# Altium PCB ARMBAND.PcbDoc
Units mm, origin at the board's own origin, x right, y up, seen from the top; angles counter-clockwise.
Board outline 29.72 x 39.62 mm, 2 copper layers (Top Layer, Bottom Layer); 21 components, 22 nets, 97 pads, 30 vias.
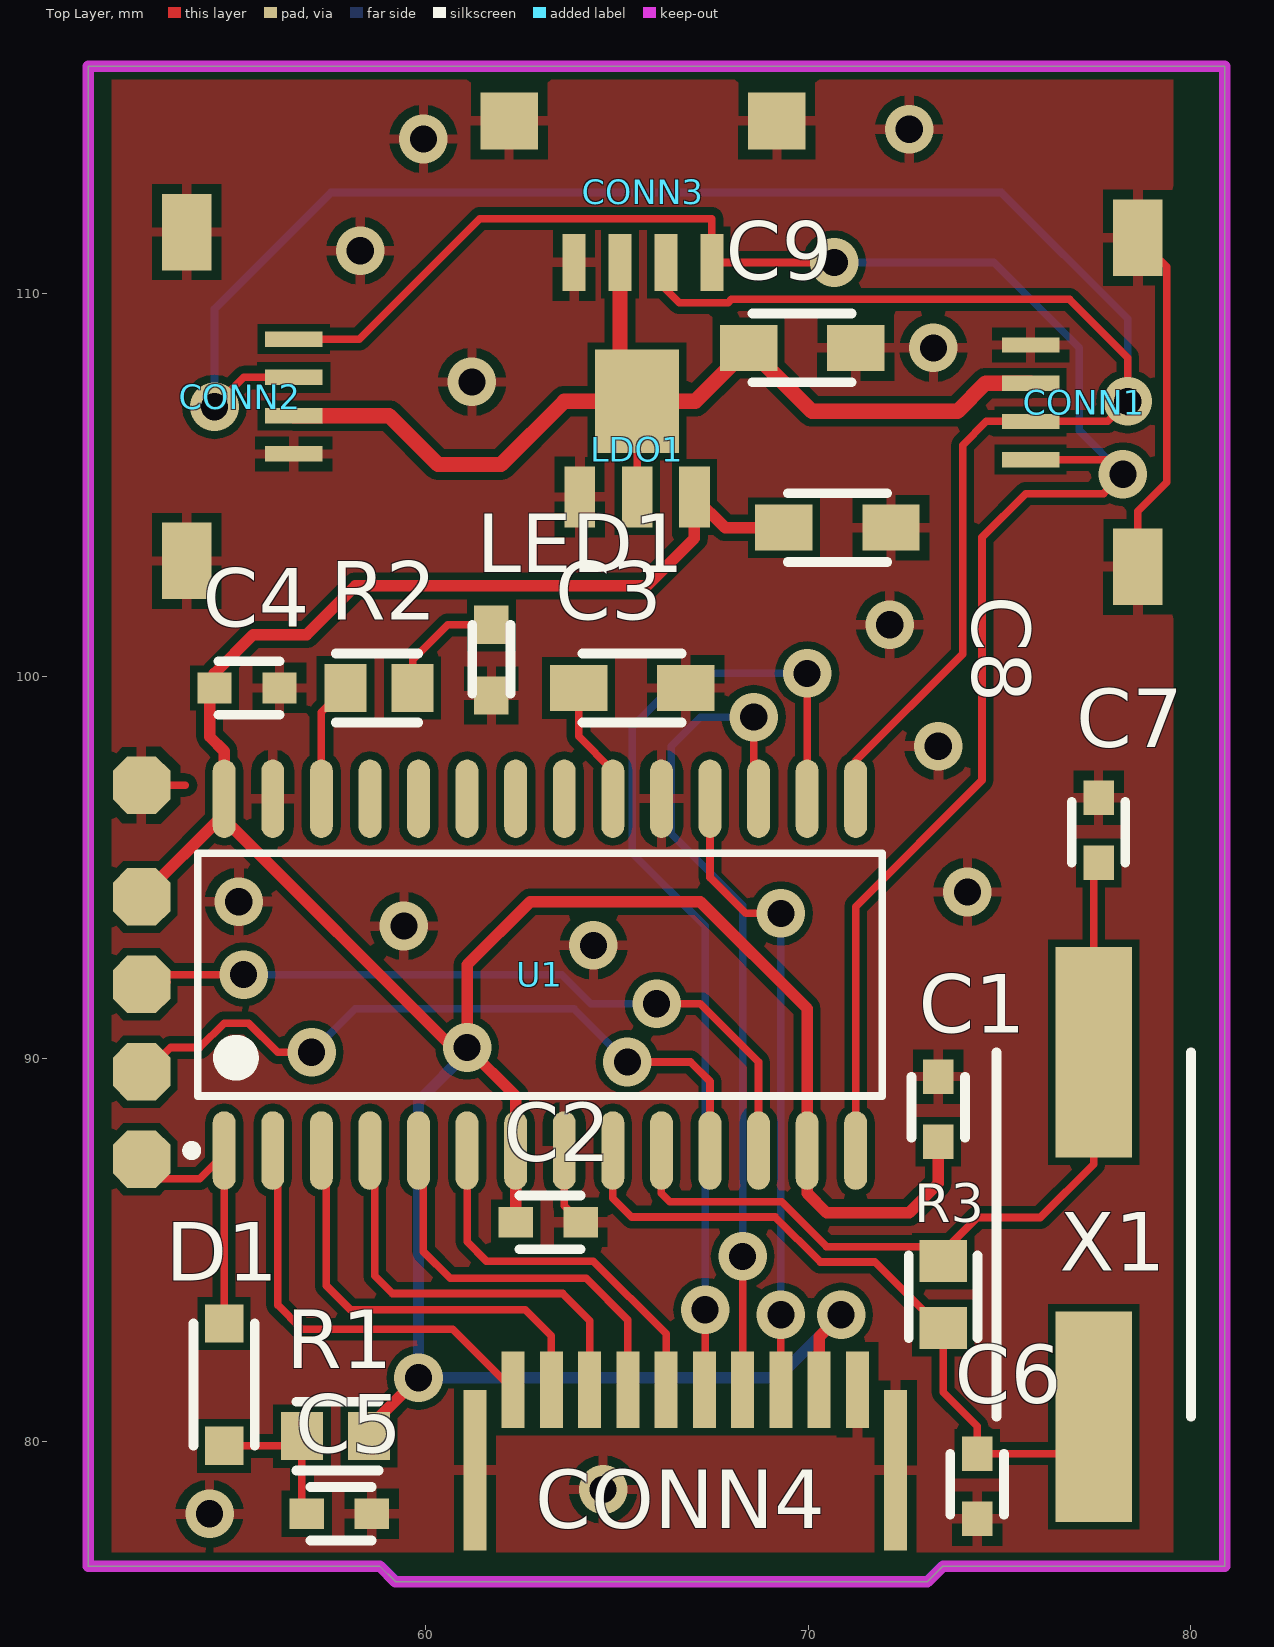
[diagram p0: Top Layer view]
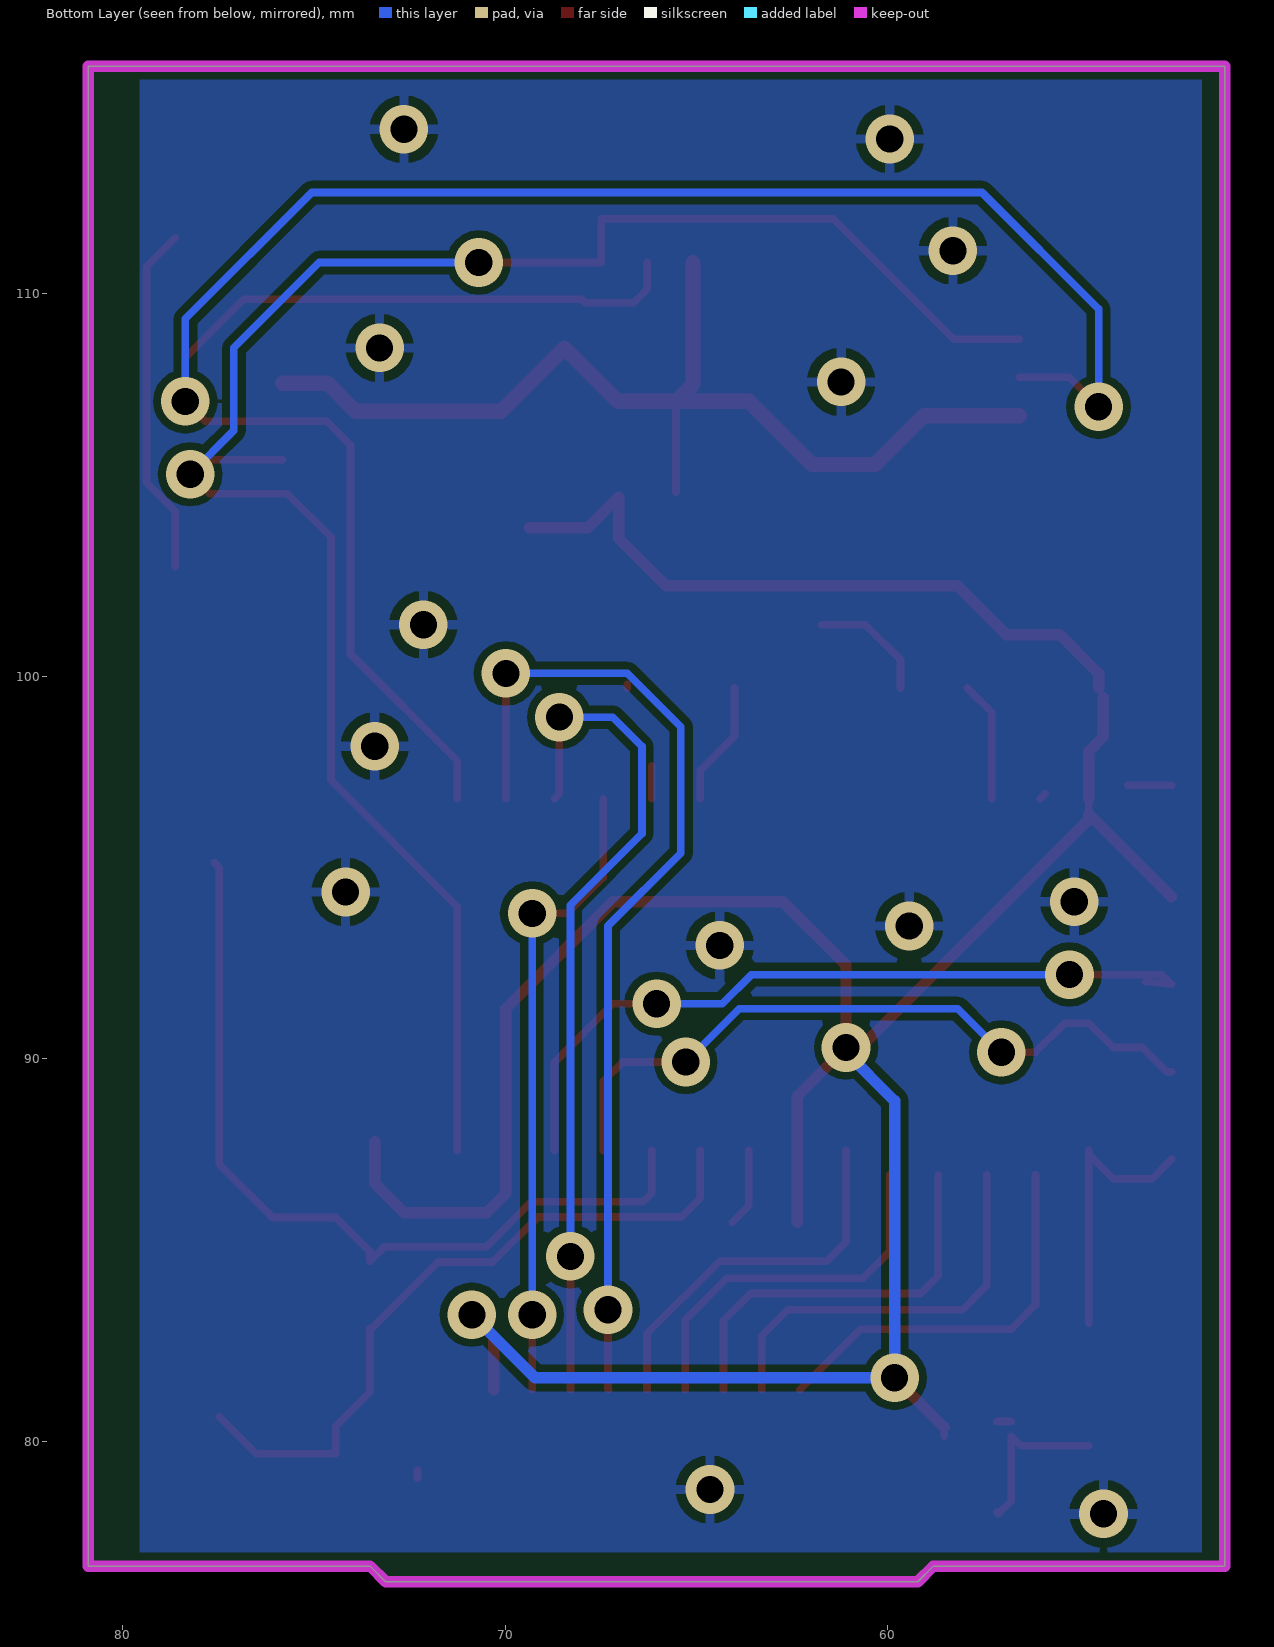
[diagram p1: Bottom Layer view, seen from below]

## Layer stack, top to bottom
Top Solder: solder mask 0.0102, Solder Resist, Dk 3.5
Top Layer: signal copper 0.0356
Dielectric 1: dielectric 0.32, FR-4, Dk 4.8
Bottom Layer: signal copper 0.0356
Bottom Solder: solder mask 0.0102, Solder Resist, Dk 3.5

## Board outline
51.181,77.605 51.181,115.951 80.899,115.951 80.899,76.738 73.533,76.738 73.122,76.327 59.212,76.327 58.801,76.738 51.181,76.738

## Design rules (kind name [scope] priority, off if disabled: settings)
Clearance [All] p1: gap=0.2 ignorepadtopadclearanceinfootprint=FALSE
PolygonConnect [All] p1: connectstyle=Relief reliefconductorwidth=0.254 reliefentries=4 polygonreliefangle="90 Angle" airgapwidth=0.254
RoomDefinition ARMBAND [InComponentClass('ARMBAND')] p1: confinementstyle=ConfineIn formatcopy=TRUE lockcomponents=FALSE outline 50.447,75.819 81.153,75.819 81.153,116.459 50.447,116.459
RoutingVias [All] p1: holewidth=0.6 width=1 viastyle="Through Hole" minholewidth=0.711 minwidth=1.27 maxholewidth=0.711 maxwidth=1.27
SolderMaskExpansion [All] p1: expansion=0.102
Width [All] p1: maxlimit=0.4 minlimit=0.2 preferedwidth=0.2 bottomlayer_maxwidth=0.3 minimp=50.000000 maximp=50.000000 favimp=50.000000
30 further rules are at their usual default settings.

## Components (designator, comment, footprint, x,y, rotation, side; value= is the part's Value field where it differs from the comment)
C1 "100nF" CApacitor_1608 73.406,87.835 r90 top
C2 "100nF" CApacitor_1608 62.357,85.725 r0 top
C3 "1uF" Capacitor_20x12 64.102,99.695 r0 top
C4 "100nF" CApacitor_1608 54.483,99.695 r0 top
C5 "100nF" CApacitor_1608 56.896,78.105 r0 top
C6 "30pF" CApacitor_1608 74.422,77.978 r90 top
C7 "30pF" CApacitor_1608 77.597,96.823 r270 top
C8 "1uF" Capacitor_20x12 69.469,103.886 r0 top
C9 "1uF" Capacitor_20x12 68.547,108.585 r0 top
CONN1 "4_pin_connector" 4PIN_1MMPITCH_FFC_FCP_ZIF 78.019,107.164 r270 top
CONN2 "4_pin_connector" 4PIN_1MMPITCH_FFC_FCP_ZIF 54.356,107.315 r90 top
CONN3 "4_pin_connector" 4Pin_PICO_EZ_MATE_Header 65.786,113.919 r180 top
CONN4 "10_pin_connector" 10Pin_1mmpitch_FFC_FCP_ZIF 61.291,79.248 r0 top
D1 "Diode_SMD" DIODE_17x38 54.737,79.883 r90 top
LDO1 "Voltage Reg." LDO_460x260 65.532,104.688 r0 top
LED1 "LED_SMD" LED_1608 61.722,101.346 r270 top
R1 "1kOhm" Resistor_1608 58.519,80.137 r180 top
R2 "100Ohm" Resistor_1608 57.912,99.695 r0 top
R3 "1MOhm" Resistor_1608 73.533,82.959 r90 top
U1 "DSPIC33EP128MC202-I/SO" MCHP-SOIC-SO28_N 62.992,92.202 r90 top
X1 "8MHz" xTal_150x20 77.47,80.645 r90 top

## Footprints (in the part's own frame and the unit in brackets; to place one, negate y for a bottom-side part, rotate by r counter-clockwise, add the part's x,y. Pads: shape width x height; smd on the part's side, far side on the other; paste and mask are expansions set on the pad)
4PIN_1MMPITCH_FFC_FCP_ZIF [mm]
  rect 0.4x1.5 smd: 1(1.5,-2.2) 2(0.5,-2.2) 3(-0.5,-2.2) 4(-1.5,-2.2)
  rect 2x1.3 smd: GND(-4.3,0.6) GND(4.3,0.6)
  body extent -5,-2.55 5,2.75, height 1.88
4Pin_PICO_EZ_MATE_Header [mm]
  rect 0.6x1.5 smd: 1(-1.7,3.1) 2(-0.5,3.1) 3(0.7,3.1) 4(1.9,3.1)
  rect 1.5x1.5 smd: GND(-3.4,-0.6) GND(3.6,-0.6)
  body extent -3.3,-1.5 3.3,3.03, height 1.55
10Pin_1mmpitch_FFC_FCP_ZIF [mm]
  rect 0.6x2 smd: 1(1,2.1) 2(2,2.1) 3(3,2.1) 4(4,2.1) 5(5,2.1) 6(6,2.1) 7(7,2.1) 8(8,2.1) 9(9,2.1) 10(10,2.1)
  rect 0.6x4.2 smd: GND(0,0) GND(11,0)
  body extent 0,-2.5 11,1.6, height 1
Capacitor_20x12 [mm]
  rect 1.5x1.2 smd: Cap_p1(-0.1,0) Cap_p2(2.7,0)
  silkscreen extent 0,-0.9 2.6,0.9, body extent -0.4,-0.7 2.95,0.7, height 1.5
CApacitor_1608 [mm]
  rect 0.9x0.8 smd: Cap_p1(0,0) Cap_p2(1.7,0)
  silkscreen extent 0.1,-0.7 1.7,0.7, body extent -0.3,-0.5 2,0.5, height 1.5
DIODE_17x38 [mm]
  rect 1x1 smd: Anode(0,0) Cathode(3.2,0)
  silkscreen extent 0,-0.8 3.2,0.8, body extent 0.2,-0.8 3,0.8, height 1.5
LDO_460x260 [mm]
  rect 0.8x1.6 smd: GND(-1.5,0) Vin(0,0) Vout(1.5,0)
  rect 2.2x2.7 smd: Vin(0,2.5)
  body extent -2.5,0 2.5,2.2, height 1.6
LED_1608 [mm]
  rect 1x0.9 smd: Anode(0,0) Cathode(1.85,0)
  silkscreen extent 0,-0.5 1.8,0.5, body extent 0,-0.4 1.8,0.4, height 0.9
MCHP-SOIC-SO28_N [mm] "SOIC, 28-Leads, Body 17.9x7.5mm, Pitch 1.27mm, IPC Medium Density"
  oval 2.05x0.6 smd: 1(-4.6,8.255) 2(-4.6,6.985) 3(-4.6,5.715) 4(-4.6,4.445) 5(-4.6,3.175) 6(-4.6,1.905) 7(-4.6,0.635) 8(-4.6,-0.635) 9(-4.6,-1.905) 10(-4.6,-3.175) 11(-4.6,-4.445) 12(-4.6,-5.715) 13(-4.6,-6.985) 14(-4.6,-8.255) 15(4.6,-8.255) 16(4.6,-6.985) 17(4.6,-5.715) 18(4.6,-4.445) 19(4.6,-3.175) 20(4.6,-1.905) 21(4.6,-0.635) 22(4.6,0.635) 23(4.6,1.905) 24(4.6,3.175) 25(4.6,4.445) 26(4.6,5.715) 27(4.6,6.985) 28(4.6,8.255)
  silkscreen extent -4.72,-8.95 3.18,9.23, body extent -3.75,-8.95 3.75,8.95, height 2.65
Resistor_1608 [mm]
  rect 1.1x1.25 smd: Res_p1(0,0) Res_p2(1.75,0)
  silkscreen extent -0.26,-0.9 1.9,0.9, body extent -0.4,-0.7 2.2,0.7, height 1.5
xTal_150x20 [mm]
  rect 5.5x2 smd: xTal_0(0,0) xTal_1(9.525,0)
  silkscreen extent 0,-2.54 9.53,2.54, body extent -0.1,-2.1 9.1,2.1, height 2.5

## Part data
C1 C2 C3 C4 C5 C6 C7 C8 C9: library part Capacitor_SMD, "SMD Capacitor"
CONN1 CONN2 CONN3: "4 Pin Connector"
CONN4: "10 Pin Connector"
D1: "SMD Diode"
LDO1: library part Voltage_Regulator_3.3V, "LDO Voltage Regulator", Manifacturer="ST Microelectronics"
LED1: "SMD Blue LED"
R1 R2 R3: library part Resistor_SMD, "SMD Resistor", Manifacturer=Vishay
U1: "16-Bit Microcontroller and Digital Signal Controller with High-Speed PWM, Op Amps and Advanced Analog, 70 MIPS, 21 I/O, GPIO, -40 to 85 degC, 28-pin SOIC (SO28), Tube", Manufacturer=Microchip, Supplier Part Number 1=DSPIC33EP128MC202-I/SO-ND, ComponentLink1Description="Manufacturer URL", ComponentLink1URL=http://www.microchip.com, ComponentLink2Description=Datasheet, ComponentLink2URL=http://ww1.microchip.com/downloads/en/DeviceDoc/70657F.pdf, ComponentLink3Description="Package Specification", ComponentLink3URL=http://www.microchip.com/stellent/groups/techpub_sg/documents/packagingspec/en012702.pdf, ComponentLink4Description="Product URL", ComponentLink4URL=http://www.microchip.com/dsPIC33EP128MC202, DatasheetVersion="Rev. F", Mounting Technology="Surface Mount", PackageDescription="28-Lead Plastic Small Outline, 17.9 x 7.5 mm Body, 1.27 mm Pitch", PackageReference=SOIC-SO28, PackageVersion=C04-052C, PartNumber=DSPIC33EP128MC202-I/SO, Supplier 1=Digi-Key, Supplier 2=Mouser, Supplier Part Number 2=579-33EP128MC202ISO
X1: library part xTal_ECS_inc, "8MHz Crystal/Resonator", Frequency=8MHz, Manifacturer="ECS International"

## Free pads (board coordinates)
  oct 1.5x1.5 smd: ""(52.578,87.376) ""(52.578,89.662) ""(52.578,91.948) ""(52.578,94.234) ""(52.578,97.155)

## Via types
v1: diameter 1.27, hole 0.711, Top Layer to Bottom Layer, 30 vias

## Nets (pads, with @x,y where several pads share a name; then routed paths per layer and width w, separated by ;. In a path a pad name is that pad's centre, name@x,y a point inside that pad or via, vN(x,y) a via of type N, cw(c..) or ccw(c..) an arc to the next point about the centre after c; other vN are vias at no path point)
3V3: C1.Cap_p1 C2.Cap_p1 C4.Cap_p1 C8.Cap_p1 CONN4.9 LDO1.Vout pad.@52.578,94.234 R1.Res_p1 U1.7 U1.13 U1.28 | length 86.4
  Top Layer w0.2: U1.28@54.737,96.266 54.737,96.393 U1.28 ; R1.Res_p1 R1.Res_p1@58.519,80.363 ; v1@60.706,90.297 v1(61.087,90.297)
  Top Layer w0.3: pad.@52.578,94.234 U1.28@54.737,96.393 ; C4.Cap_p1@54.356,99.441 54.356,98.425 54.737,98.044 U1.28 ; C4.Cap_p1 54.483,100.076 55.499,101.092 56.896,101.092 58.166,102.362 65.786,102.362 67.032,103.608 LDO1.Vout 67.834,103.886 C8.Cap_p1 ; U1.28@54.737,96.266 v1@60.706,90.297 ; R1.Res_p1@58.519,80.363 v1(59.817,81.661) ; C2.Cap_p1 U1.7 62.357,89.027 v1(61.087,90.297) 61.087,92.456 62.738,94.107 67.183,94.107 69.977,91.313 U1.13 69.977,86.487 70.485,85.979 72.644,85.979 73.406,86.741 C1.Cap_p1 ; CONN4.9 70.291,82.737 v1(70.866,83.312)
  Bottom Layer w0.3: v1(61.087,90.297) 61.087,90.17 59.817,88.9 v1(59.817,81.661) 69.215,81.661 v1(70.866,83.312)
5V: C9.Cap_p1 CONN1.3 CONN2.3 CONN3.3 LDO1.Vin | length 28.2
  Top Layer w0.2: LDO1.Vin@65.532,104.815 LDO1.Vin@65.532,107.188
  Top Layer w0.4: CONN2.3 59.047,106.815 60.325,105.537 61.976,105.537 63.627,107.188 LDO1.Vin@65.532,107.188 ; CONN3.3 65.086,107.634 LDO1.Vin@65.532,107.188 ; CONN1.3 74.644,107.664 73.908,106.928 70.104,106.928 C9.Cap_p1 67.05,107.188 LDO1.Vin@65.532,107.188
\M\C\L\R\: D1.Cathode pad.@52.578,87.376 U1.1 | length 7.2
  Top Layer w0.2: pad.@52.578,87.376 53.086,86.868 54.102,86.868 U1.1@54.737,87.503 ; D1.Cathode U1.1@54.737,87.503 ; U1.1 U1.1@54.737,87.503
AN0: CONN4.1 U1.2 | length 10.5
  Top Layer w0.2: U1.2@56.134,86.967 56.134,83.566 56.769,82.931 60.708,82.931 CONN4.1
AN1: CONN4.2 U1.3 | length 10.7
  Top Layer w0.2: U1.3@57.404,86.967 57.404,84.074 58.039,83.439 62.611,83.439 63.291,82.759 CONN4.2
AN2: CONN4.3 U1.4 | length 10.5
  Top Layer w0.2: U1.4@58.674,86.967 58.674,84.328 59.139,83.863 63.584,83.863 64.291,83.156 CONN4.3
AN3: CONN4.4 U1.5 | length 9.9
  Top Layer w0.2: U1.5@59.944,86.967 59.944,84.963 60.644,84.263 64.2,84.263 65.291,83.172 CONN4.4
AN4: CONN4.5 U1.6 | length 10
  Top Layer w0.2: U1.6 61.087,85.217 61.595,84.709 64.389,84.709 66.291,82.807 CONN4.5
AN19: CONN4.6 U1.16 | length 26.6
  Top Layer w0.2: CONN4.6 67.31,81.367 v1(67.31,83.439) ; U1.16 v1(69.977,100.076)
  Bottom Layer w0.2: v1(67.31,83.439) 67.31,93.472 65.405,95.377 65.405,98.679 66.802,100.076 v1(69.977,100.076)
AN20: CONN4.7 U1.17 | length 22.4
  Top Layer w0.2: CONN4.7 v1(68.291,84.836) ; v1(68.58,98.933) 68.58,96.929 U1.17
  Bottom Layer w0.2: v1(68.291,84.836) 68.291,94.015 66.421,95.885 66.421,98.171 67.183,98.933 v1(68.58,98.933) v1@68.707,98.933
AN21: CONN4.8 U1.18 | length 16.8
  Top Layer w0.2: U1.18 67.437,94.742 68.377,93.802 v1(69.291,93.802) ; CONN4.8 v1(69.291,83.312)
  Bottom Layer w0.2: v1(69.291,83.312) v1(69.291,93.802)
GND: C1.Cap_p2 C2.Cap_p2 C3.Cap_p2 C4.Cap_p2 C5.Cap_p2 C6.Cap_p1 C7.Cap_p1 C8.Cap_p2 C9.Cap_p2 CONN1.4 CONN1.GND CONN2.4 CONN2.GND CONN3.4 CONN3.GND CONN4.10 CONN4.GND LDO1.GND LED1.Cathode pad.@52.578,97.155 U1.8 U1.19 U1.27 | length 13.8
  Top Layer w0.2: pad.@52.578,97.155 53.721,97.155 ; U1.27@55.88,96.929 U1.27 ; U1.8 63.627,86.155 C2.Cap_p2 ; U1.19 U1.19@66.167,97.663 ; C3.Cap_p2 C3.Cap_p2@66.802,99.786 ; CONN4.GND@72.291,79.037 CONN4.GND@72.291,79.248 ; CONN1.GND@78.619,102.864 78.619,104.316 79.375,105.072 79.375,110.708 CONN1.GND@78.619,111.464
  other v1: 54.356,78.105 64.643,78.74 64.389,92.964 59.436,93.472 55.118,94.107 74.168,94.361 73.406,98.171 72.136,101.346 61.214,107.696 73.279,108.585 58.293,111.125 59.944,114.046 72.644,114.3
NetC5_Cap_p1: C5.Cap_p1 D1.Anode R1.Res_p2 | length 4.8
  Top Layer w0.2: D1.Anode 56.515,79.883 R1.Res_p2 56.769,78.437 57.101,78.105 C5.Cap_p1@57.15,78.154 ; R1.Res_p2@56.769,80.518 R1.Res_p2@57.15,80.518
NetLED1_Anode: LED1.Anode R2.Res_p2 | length 3.2
  Top Layer w0.2: R2.Res_p2 59.662,100.429 60.579,101.346 LED1.Anode
OSC1: C6.Cap_p2 R3.Res_p1 U1.9 X1.xTal_0 | length 18.4
  Top Layer w0.2: U1.9 64.897,86.36 65.394,85.863 69.146,85.863 70.319,84.69 71.746,84.69 73.505,82.931 R3.Res_p1 73.533,81.28 74.422,80.391 C6.Cap_p2 76.503,79.678 X1.xTal_0
OSC2: C7.Cap_p2 R3.Res_p2 U1.10 X1.xTal_1 | length 22.3
  Top Layer w0.2: U1.10 66.167,86.487 66.391,86.263 69.312,86.263 70.485,85.09 73.152,85.09 R3.Res_p2 73.533,84.963 74.422,85.852 76.073,85.852 77.47,87.249 X1.xTal_1 77.47,94.996 C7.Cap_p2
PGEC2: pad.@52.578,91.948 U1.12 | length 20.2
  Top Layer w0.2: pad.@53.245,92.011 52.578,91.948 52.832,92.202 v1(55.245,92.202) ; v1(66.04,91.44) 67.183,91.44 68.707,89.916 U1.12
  Bottom Layer w0.2: v1(55.245,92.202) 63.558,92.202 64.32,91.44 v1(66.04,91.44)
PGED2: pad.@52.578,89.662 U1.11 | length 18.8
  Top Layer w0.2: pad.@52.578,89.662 52.705,89.662 53.34,90.297 54.102,90.297 54.737,90.932 55.372,90.932 56.134,90.17 v1(57.023,90.17) ; v1(65.278,89.916) 66.929,89.916 67.437,89.408 U1.11
  Bottom Layer w0.2: v1(57.023,90.17) 58.166,91.313 63.881,91.313 v1(65.278,89.916)
PWM1: R2.Res_p1 U1.26 | length 3.2
  Top Layer w0.2: U1.26 57.277,99.06 R2.Res_p1
SCL: CONN1.2 CONN2.2 CONN3.2 U1.15 | length 63.7
  Top Layer w0.2: v1(54.483,107.045) 55.253,107.815 CONN2.2 ; CONN3.2 66.286,110.117 66.634,109.769 67.91,109.769 67.996,109.855 76.835,109.855 78.359,108.331 v1(78.359,107.188) 77.835,106.664 CONN1.2 74.66,106.664 74.041,106.045 74.041,100.584 71.247,97.79 U1.15
  Bottom Layer w0.2: v1(54.483,107.045) 54.483,109.601 57.531,112.649 75.057,112.649 78.359,109.347 v1(78.359,107.188) v1@78.216,107.045
SDA: CONN1.1 CONN2.1 CONN3.1 U1.14 | length 52
  Top Layer w0.2: CONN2.1 58.269,108.815 61.419,111.965 67.486,111.965 CONN3.1 v1(70.687,110.819) ; U1.14 71.247,93.98 74.549,97.282 74.549,103.632 75.692,104.775 77.724,104.775 v1(78.232,105.283) 77.851,105.664 CONN1.1
  Bottom Layer w0.2: v1(70.687,110.819) 74.855,110.819 77.089,108.585 77.089,106.426 v1(78.232,105.283)
VCAP: C3.Cap_p1 U1.20 | length 3.3
  Top Layer w0.2: C3.Cap_p1 64.002,98.431 64.897,97.536 U1.20
pads on no net: U1.21 U1.22 U1.23 U1.24 U1.25

## Polygon pours and split planes (outlines as drawn)
GND on Top Layer "Top Layer-No Net" (solid, pour order 14): 51.435,115.951 79.909,115.951 80.137,115.723 80.137,76.708 51.465,76.708 51.435,76.738
GND on Bottom Layer "Top Layer-No Net" (solid, pour order 16): 51.435,115.951 79.909,115.951 79.909,76.738 51.435,76.738

## Keep-outs
Keep-Out Layer:
  lines w0.3: 51.181,76.738 51.181,77.605 51.181,78.322 51.181,79.443 51.181,83.836 51.181,84.957 51.181,85.675 51.181,86.795 51.181,105.894 51.181,115.951 80.899,115.951 80.899,76.738 73.533,76.738 73.122,76.327 59.212,76.327 58.801,76.738 51.181,76.738